# EAGLE board Solid-State Sidekick v2 (EAGLE 8.4.1)
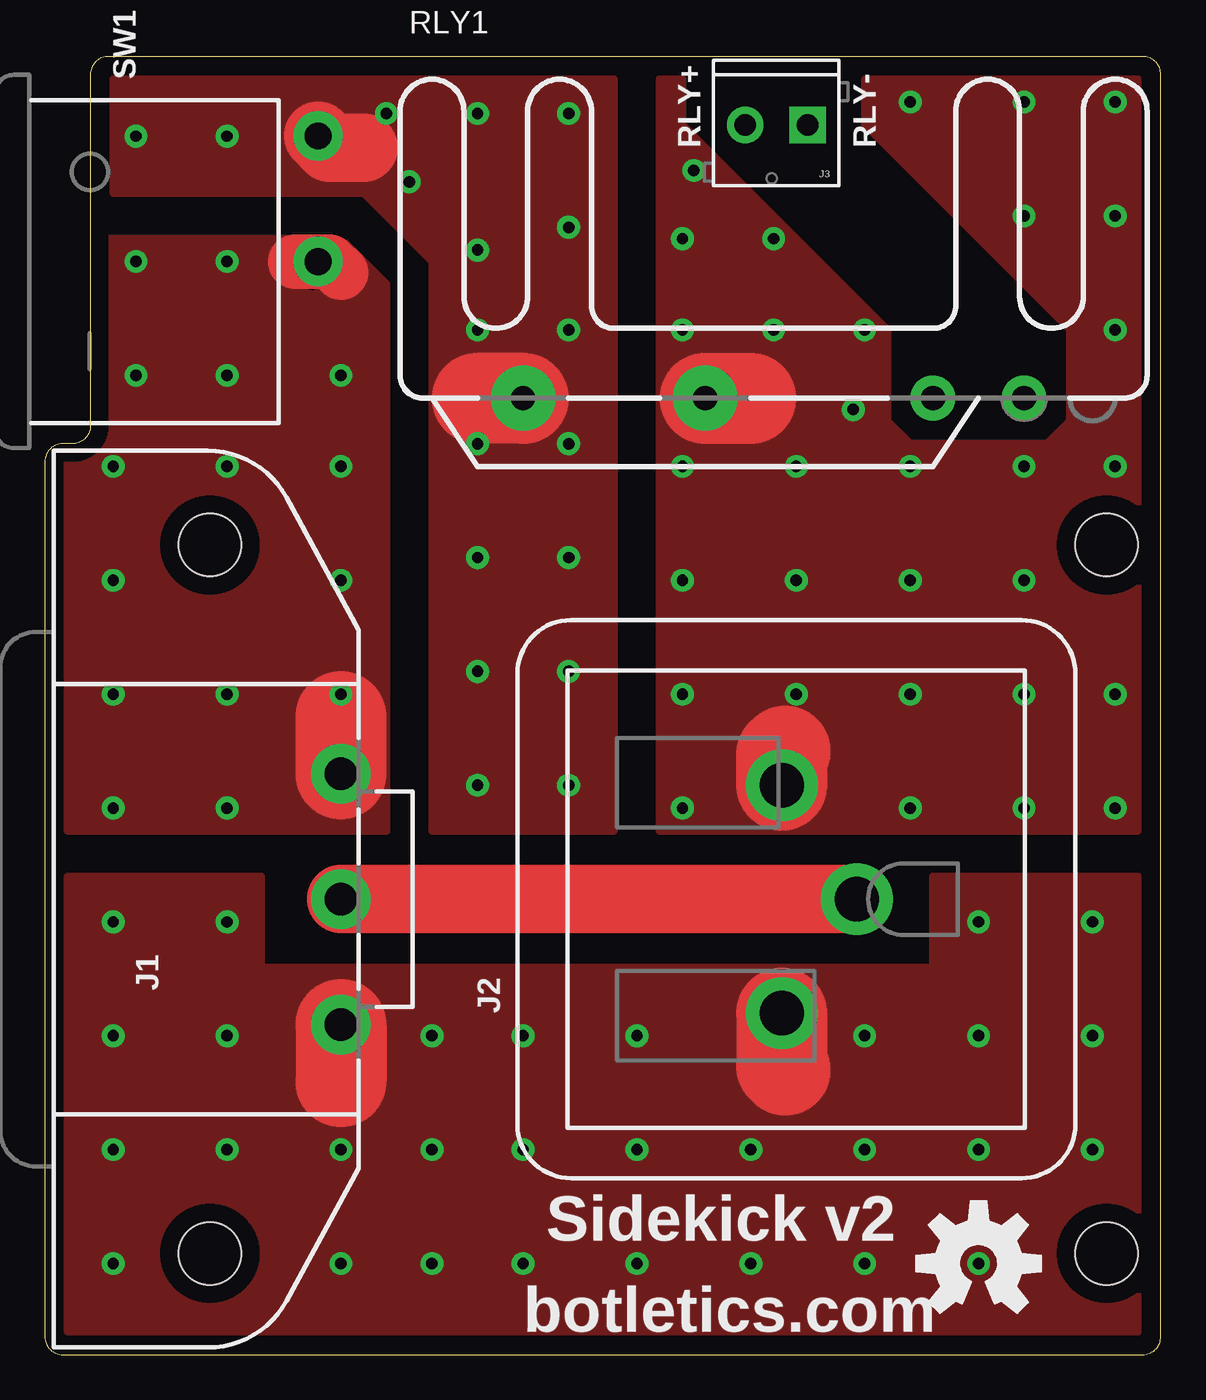
[diagram p0: board, top side]
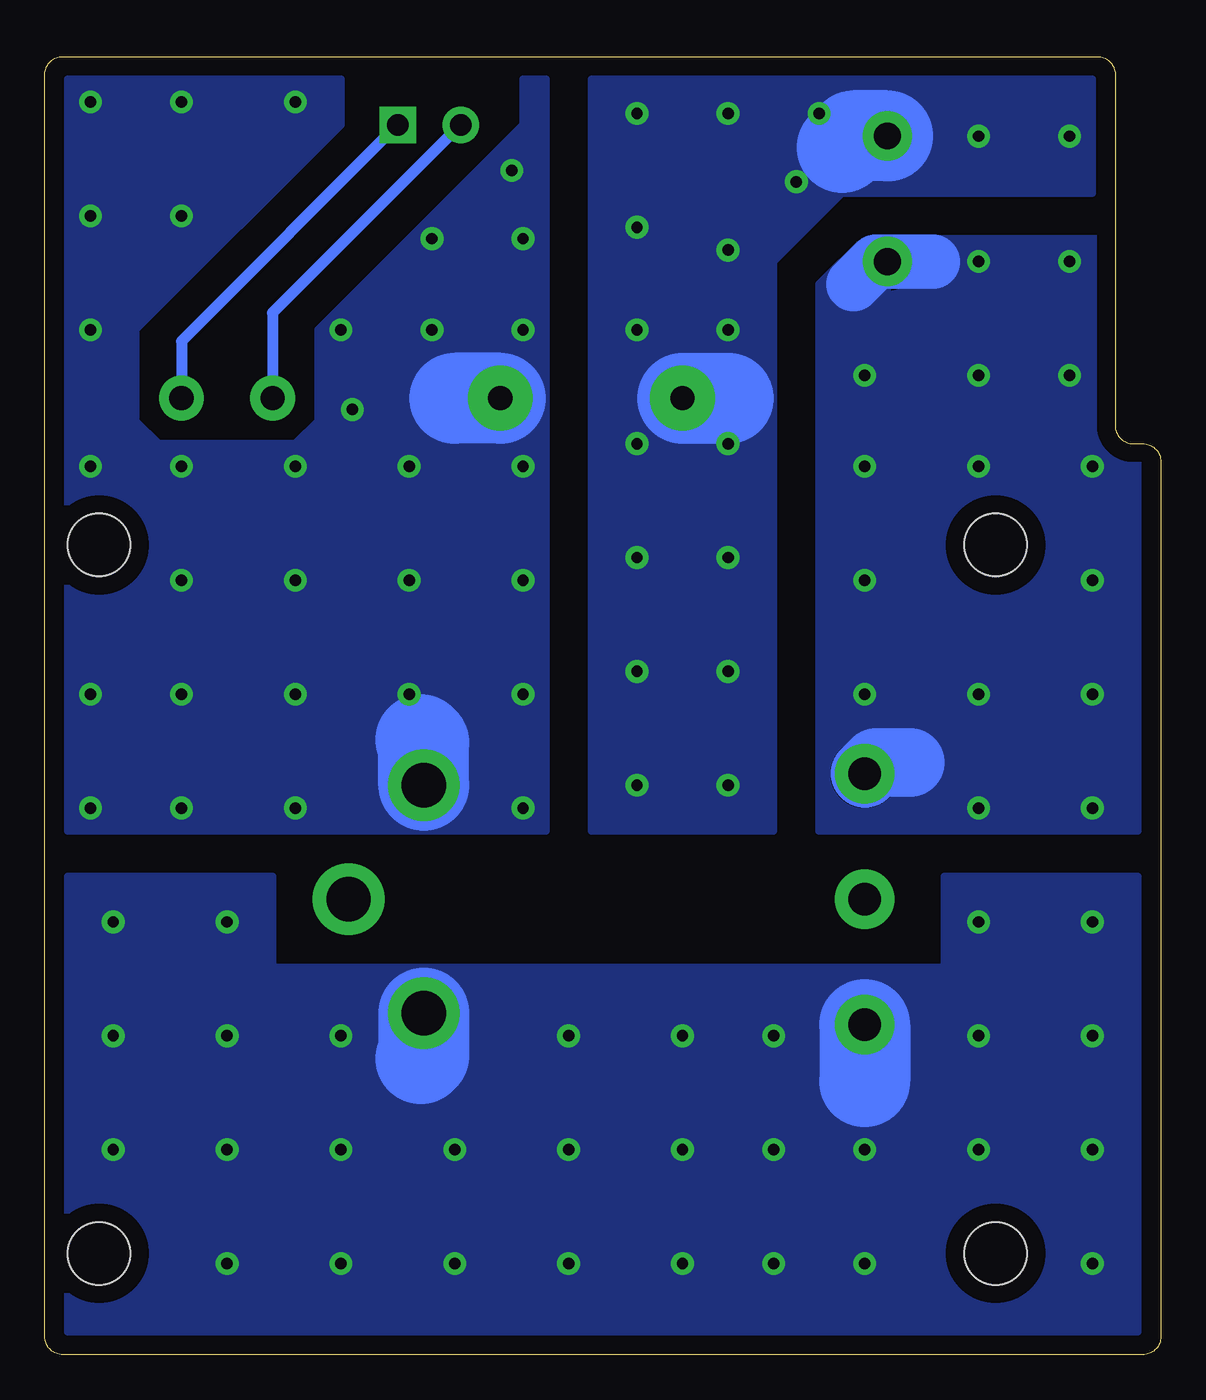
[diagram p1: board, bottom side, seen from below]

Size 62.23 x 72.39 mm. Coordinates in mm from the lower left corner, seen from the top.
Outline: 0,49.8 0,1 arc90 1,0 61.23,0 arc90 62.23,1 62.23,71.39 arc90 61.23,72.39 3.54,72.39 arc90 2.54,71.39 2.54,51.8 arc-90 1.54,50.8 1,50.8 arc90 0,49.8
Copper layers (1*16): Top 0.035mm / dielectric 1.5mm / Bottom 0.035mm
Design rules "default": minimum track width 6mil, minimum drill 0.35mm, track to track 6mil, track to pad 6mil, pad to pad 6mil, via to via 6mil, smd to smd 6mil, copper to edge 40mil, drill to drill 6mil, minimum pad ring 10mil, minimum via ring 8mil, stop-mask expansion 4mil, vias tented up to drill 0mil, thermal gap 10mil
Holes 3.5 mm at 59.21,45.15 59.21,5.65

## Footprints (pad centres in the part's own frame; a part is rotated, then mirrored left to right if it is on the bottom)
703W-00/53 = drill 1.8 pad 3.3: E 0,0; L 7,0; N -7,0 | hole 3.5: 19.75,7.3; -19.75,7.3
3-213598-2 = drill 2.47 pad 4: GND 0,-3.38; L 6.35,0.81; N -6.35,0.81
SCREWTERMINAL-3.5MM-2 = drill 1.2 pad 2.032 square: 1 0,0 | drill 1.2 pad 2.032: 2 3.5,0
RELAY_PF240 = drill 1.35 pad 2.5: 1 13.97,0; 2 8.89,0 | drill 1.35 pad 3.6: 3 -3.81,0; 4 -13.97,0
R1966ABLKBLKFR = drill 1.5 pad 2.75: 1 0,0; 2 7,0

## Placement (x,y rotation side)
J1  C14  [703W-00/53]  16.51,25.4 90 top
J2  NEMA  [3-213598-2]  41.91,25.4 90 top
J3  RLY Control  [SCREWTERMINAL-3.5MM-2]  42.55,68.58 180 top
LOGO1  OSHW-LOGOL  [OSHW-LOGO-L]  52.07,5.08 0 top
RLY1  PF240D25R  [RELAY_PF240]  40.64,53.34 0 top
SW1  Rocker  [R1966ABLKBLKFR]  15.24,60.96 90 top

## Library data of the parts
J1 J2 = TimWoo-Connectors
J3 = TimWoo-Connectors; PROD_ID: CONN-08399
LOGO1 = SparkFun-Aesthetics
RLY1 SW1 = TimWoo-Electromechanical

## Nets
GND: J1.E J2.GND
L: RLY1.4 SW1.2
L_SW: J2.L RLY1.3
L_WALL: J1.L SW1.1
N: J1.N J2.N
RLY+: J3.2 RLY1.2
RLY-: J3.1 RLY1.1

## Tracks (layer width: path | path; a pad name or v marks a point on that pad's centre or on a via)
GND
  Top 3.81: J1.E J2.GND
L  (via drill 0.64 pad 1.27)
  Top 3.81: SW1.2 15.89,67.31 17.78,67.31
  Top 5.08: RLY1.4 24.13,53.34
  Bottom 5.08: SW1.2 17.13,67.96 17.78,67.31 | RLY1.4 24.13,53.34
  other vias: 5.08,67.94 10.16,67.94 24.13,69.22 20.32,65.41 24.13,61.59 24.13,44.45 24.13,38.1 24.13,31.75 29.21,38.1 29.21,31.75 29.21,44.45 19.05,69.22 29.21,69.22 29.21,62.87 29.21,57.15 29.21,50.8 24.13,50.8 24.13,57.15
  pour Top: 21.59,29.21 21.59,60.96 17.78,64.77 3.81,64.77 3.81,71.12 31.75,71.12 31.75,29.21
  pour Bottom: 3.81,71.12 3.81,64.77 17.78,64.77 21.59,60.96 21.59,29.21 31.75,29.21 31.75,71.12
L_SW  (via drill 0.64 pad 1.27)
  Top 5.08: RLY1.3 39.37,53.34 | J2.L 41.1,33.48 41.27,33.66
  Bottom 5.08: RLY1.3 39.37,53.34 | J2.L 41.1,34.12 41.27,34.29
  other vias: 36.2,66.04 40.64,62.23 40.64,57.15 48.26,69.85 54.61,69.85 59.69,69.85 59.69,57.15 54.61,63.5 59.69,63.5 35.56,57.15 35.56,49.53 41.91,49.53 35.56,43.18 41.91,43.18 35.56,36.83 41.91,36.83 48.26,36.83 54.61,36.83 59.69,36.83 59.69,30.48 54.61,30.48 48.26,30.48 48.26,43.18 54.61,43.18 48.26,49.53 35.56,30.48 54.61,49.53 59.69,49.53 45.72,57.15 35.56,62.23 45.09,52.7
  pour Bottom: 34.29,71.12 35.56,71.12 35.56,68.58 46.99,57.15 46.99,52.07 48.26,50.8 55.88,50.8 57.15,52.07 57.15,57.15 45.72,68.58 45.72,71.12 60.96,71.12 60.96,29.21 34.29,29.21
  pour Top: 34.29,71.12 35.56,71.12 35.56,68.58 46.99,57.15 46.99,52.07 48.26,50.8 55.88,50.8 57.15,52.07 57.15,57.15 45.72,68.58 45.72,71.12 60.96,71.12 60.96,29.21 34.29,29.21
L_WALL  (via drill 0.64 pad 1.27)
  Top 3.048: 13.97,60.96 SW1.1 15.88,60.96 16.51,60.33
  Top 5.08: J1.L 16.51,35.56
  Bottom 3.048: 12.7,60.96 SW1.1 15.88,60.96 17.14,59.69
  Bottom 3.81: J1.L 15.89,33.02 13.97,33.02
  other vias: 5.08,60.96 10.16,60.96 10.16,54.61 5.08,54.61 3.81,49.53 3.81,43.18 3.81,36.83 10.16,36.83 3.81,30.48 10.16,30.48 10.16,49.53 16.51,49.53 16.51,43.18 16.51,36.83 16.51,54.61
  pour Top: 19.05,29.21 1.27,29.21 1.27,62.23 16.51,62.23 19.05,59.69
  pour Bottom: 1.27,62.23 16.51,62.23 19.05,59.69 19.05,29.21 1.27,29.21
N  (via drill 0.64 pad 1.27)
  Top 5.08: J1.N 16.51,15.24 | J2.N 41.1,16.05 41.27,15.88
  Bottom 5.08: J1.N 16.51,15.24 | J2.N 41.1,16.68 41.27,16.51
  other vias: 3.81,24.13 10.16,24.13 3.81,17.78 10.16,17.78 3.81,11.43 3.81,5.08 10.16,11.43 16.51,11.43 16.51,5.08 21.59,5.08 21.59,11.43 21.59,17.78 26.67,17.78 26.67,11.43 33.02,11.43 39.37,11.43 39.37,5.08 45.72,5.08 45.72,11.43 45.72,17.78 52.07,17.78 52.07,11.43 52.07,5.08 58.42,11.43 58.42,17.78 26.67,5.08 33.02,5.08 52.07,24.13 58.42,24.13 33.02,17.78
  pour Top: 1.27,26.67 12.06,26.67 12.06,21.59 49.53,21.59 49.53,26.67 60.96,26.67 60.96,1.27 1.27,1.27
  pour Bottom: 1.27,26.67 12.06,26.67 12.06,21.59 49.53,21.59 49.53,26.67 60.96,26.67 60.96,1.27 1.27,1.27
RLY+
  Bottom 0.61: J3.2 49.53,58.09 RLY1.2
RLY-
  Bottom 0.61: J3.1 54.61,56.52 RLY1.1

## Text on the board
tPlace: RLY+ | RLY- | Sidekick v2 | botletics.com
tDocu: Designed by Timothy Woo / Released under CC-BY-SA-4.0 license